# Altium PCB controller.PcbDoc
Units mm, origin at the board's own origin, x right, y up, seen from the top; angles counter-clockwise.
Board outline 135 x 75 mm, 2 copper layers (Top Layer, Bottom Layer), stack 1.671 mm thick; 64 components, 55 nets, 291 pads, 47 vias.
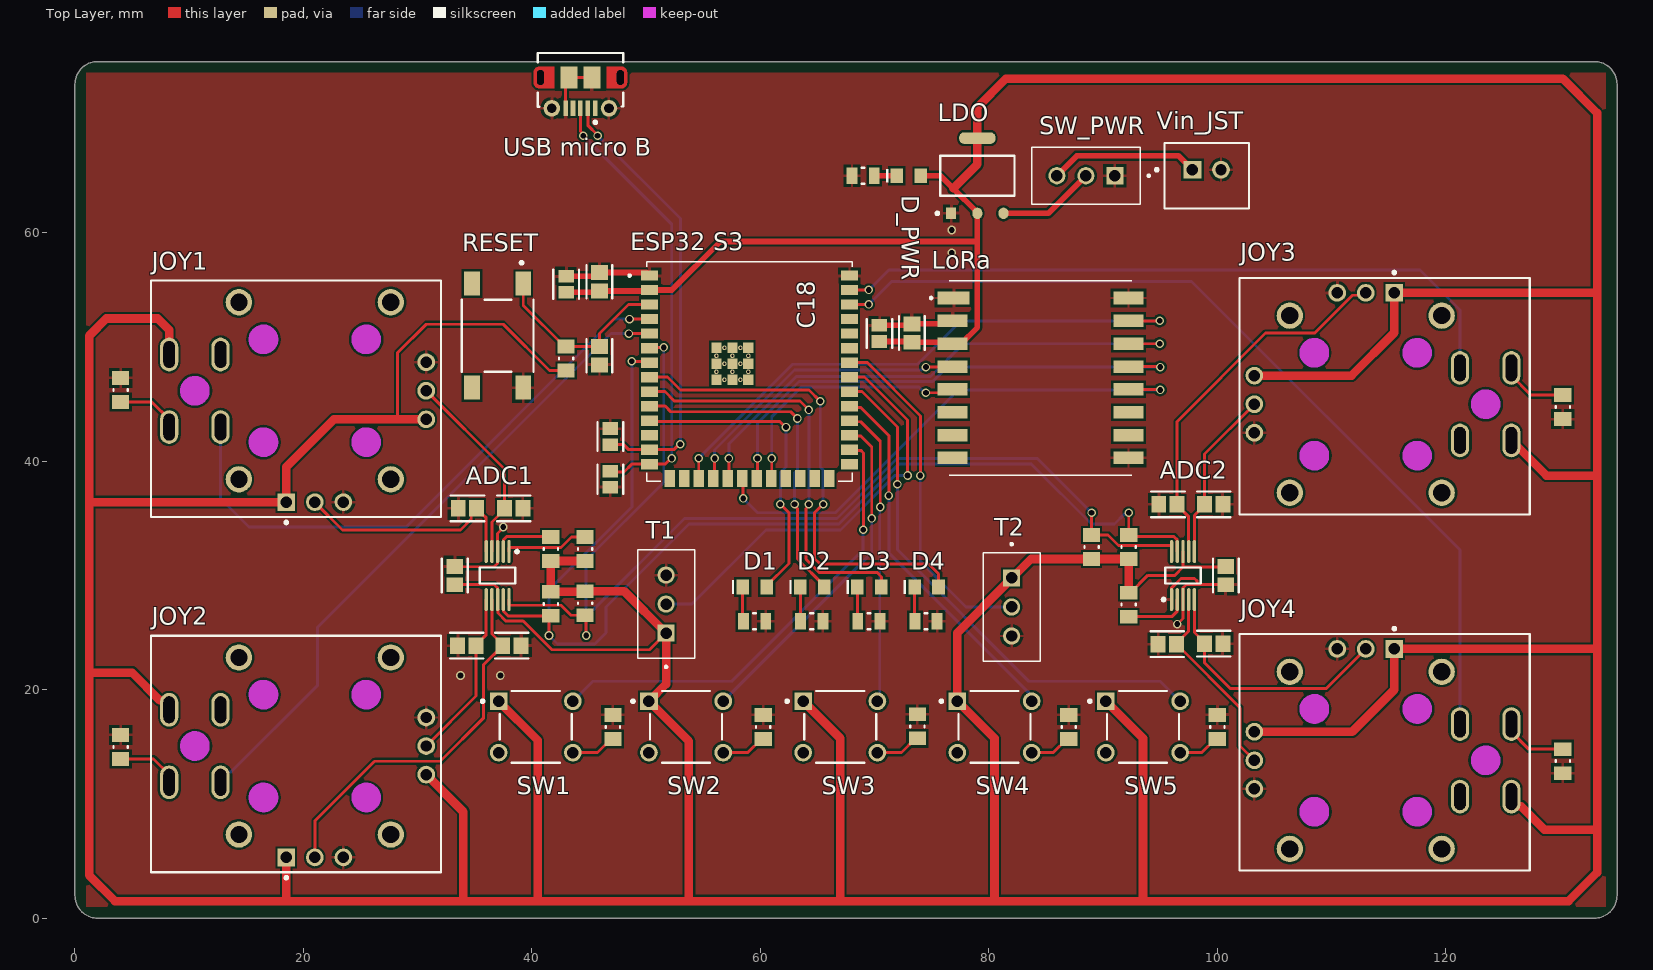
[diagram p0: Top Layer view]
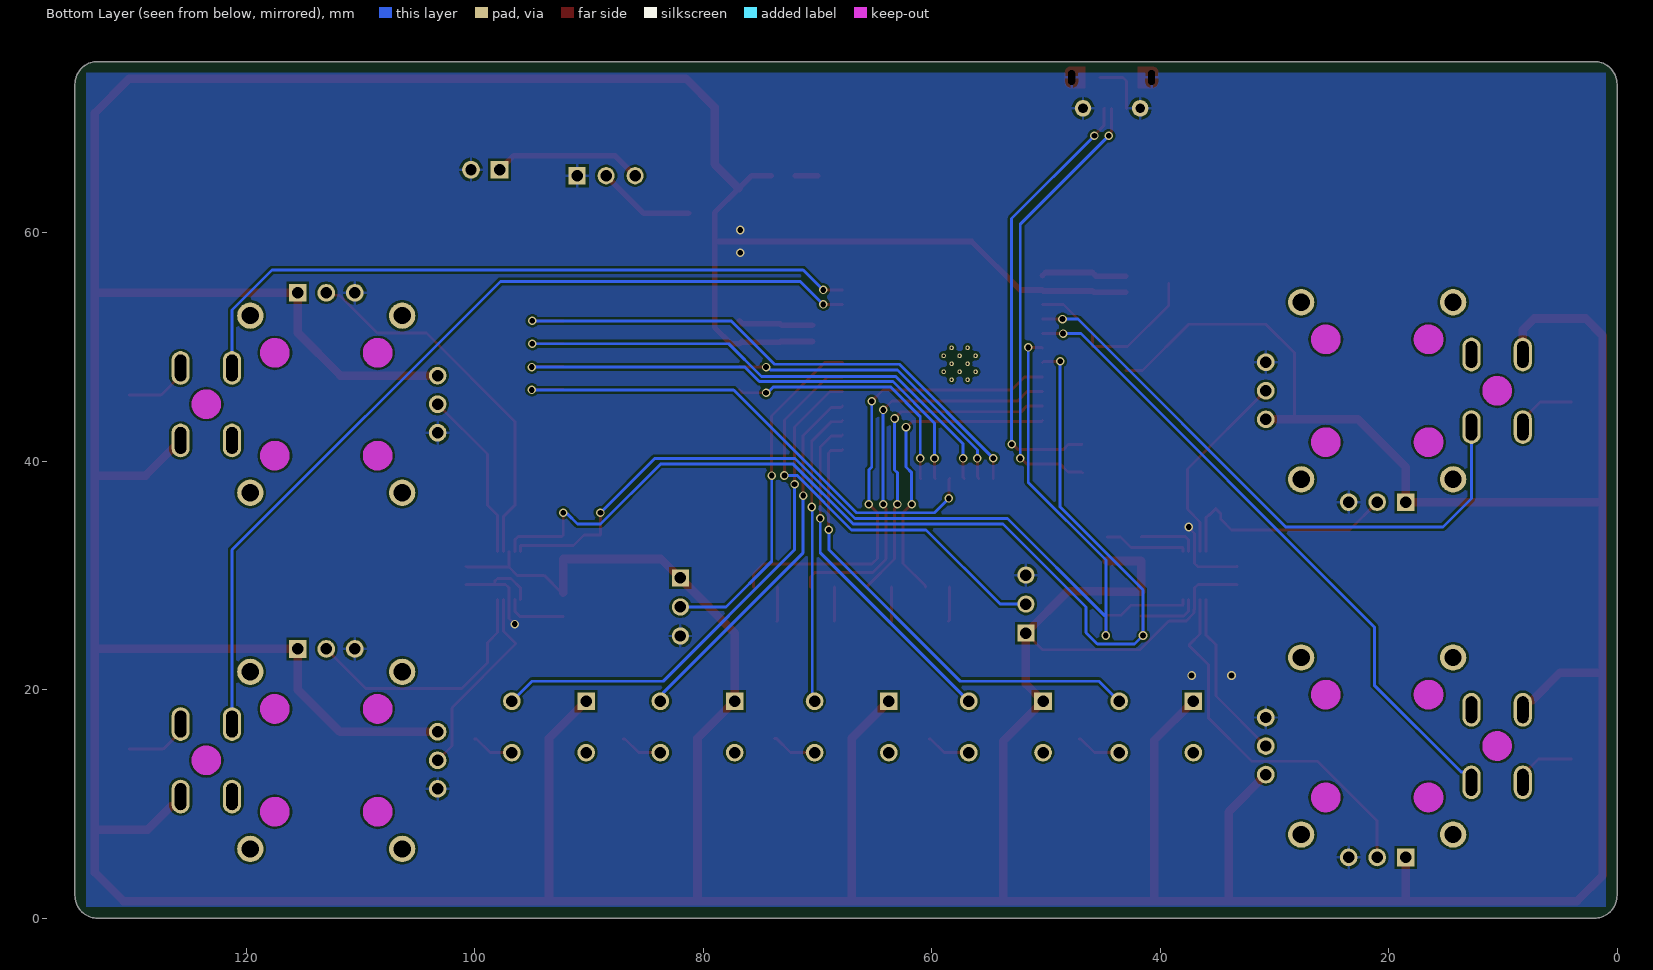
[diagram p1: Bottom Layer view, seen from below]
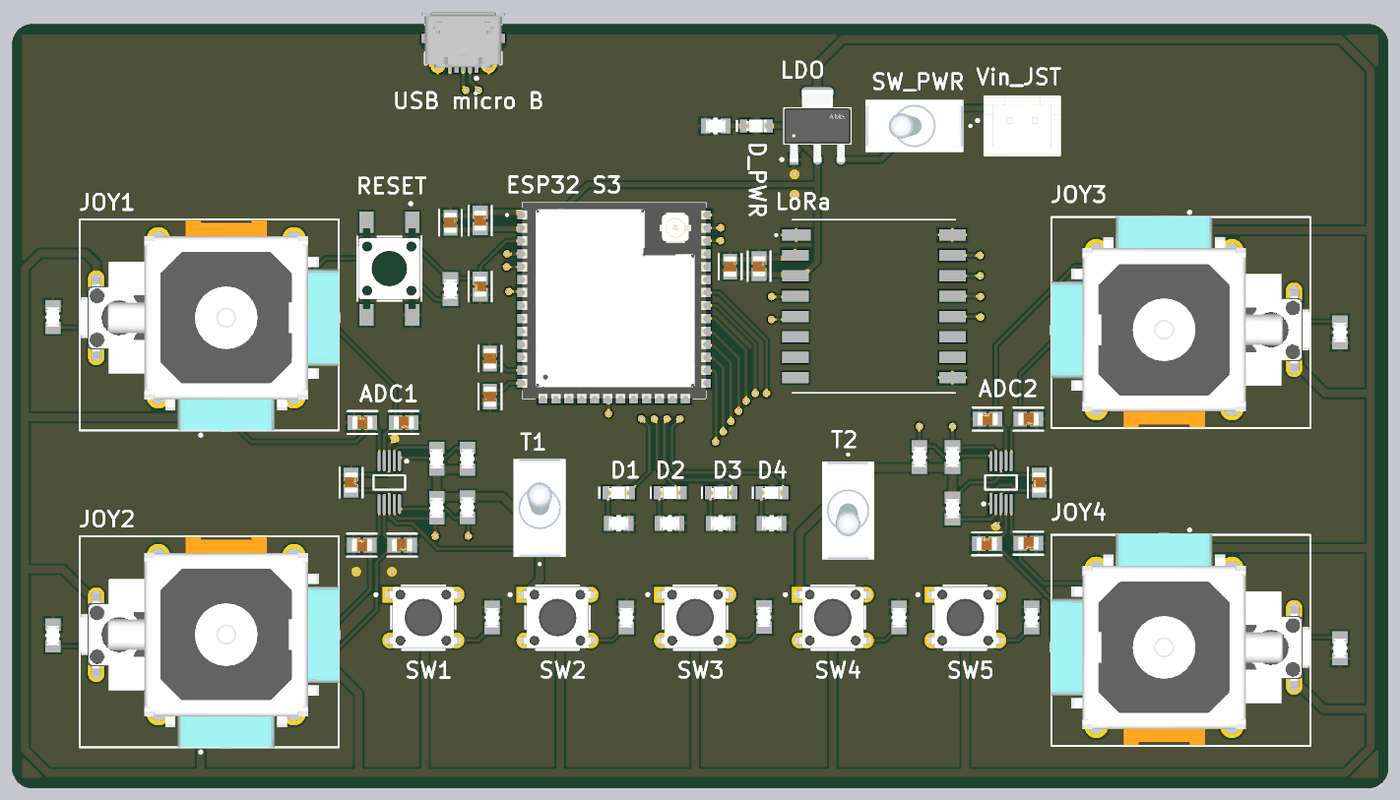
[diagram p2: 3D render of the assembled board from above, using the file's embedded part models]

## Layer stack, top to bottom
Top Solder: solder mask 0.0102, Solder Resist, Dk 3.5
Top Layer: signal copper 0.0356
Dielectric 1: dielectric 1.6, FR-4, Dk 4.6
Bottom Layer: signal copper 0.0356
Bottom Solder: solder mask 0.0102, Solder Resist, Dk 3.5

## Board outline
0,2 0,73 cw(c2,73) 2,75 133,75 cw(c133,73) 135,73 135,2 cw(c133,2) 133,0 2,0 cw(c2,2)

## Design rules (kind name [scope] priority, off if disabled: settings)
Clearance [All] p1: gap=0.2 ignorepadtopadclearanceinfootprint=TRUE
DiffPairsRouting [All] p1: maxlimit=0.254 minlimit=0.254 mostfreqgap=0.254 toplayer_minwidth=0.381 toplayer_maxwidth=0.381 toplayer_prefwidth=0.381 bottomlayer_minwidth=0.381 bottomlayer_maxwidth=0.381 bottomlayer_prefwidth=0.381 maxuncoupledlength=12.7
MinimumSolderMaskSliver [All] p1: minsoldermaskwidth=0.16
PolygonConnect [All] p1: thpad.connectstyle=Relief thpad.reliefconductorwidth=0.254 thpad.reliefentries=4 thpad.polygonreliefangle="90 Angle" thpad.airgapwidth=0.254 smdpad.connectstyle=Relief smdpad.reliefconductorwidth=0.254 smdpad.reliefentries=4 smdpad.polygonreliefangle="90 Angle" smdpad.airgapwidth=0.254 via.connectstyle=Direct via.reliefconductorwidth=0.254 via.reliefentries=4 via.polygonreliefangle="90 Angle" via.airgapwidth=0.254
RoutingVias [All] p1: holewidth=0.25 width=0.5 viastyle="Through Hole" minholewidth=0.15 minwidth=0.15 maxholewidth=0.25 maxwidth=0.5
SilkToSolderMaskClearance [IsPad] p1: minsilkscreentomaskgap=0.16 clearancetoexposedcopper=TRUE
SolderMaskExpansion [All] p1: expansion=0.102 istentingtop=FALSE
SupplyNets "Schematic Supply Nets" [InNet('GND')] p1: voltage=0.000
UnRoutedNet [All] p1: checkbadconnections=TRUE
Width [All] p1: maxlimit=1 minlimit=0.254 preferedwidth=0.254
26 further rules are at their usual default settings.

## Classes and differential pairs
differential pair D: +D_+ -D_-

## Components (designator, comment, footprint, x,y, rotation, side; value= is the part's Value field where it differs from the comment)
ADC1 "ADS1115IDGST" TI-DGS10_M 37,30 r270 top
ADC2 "ADS1115IDGST" TI-DGS10_M 97,30 r90 top
C1 "22uF" FP-0805-L_2_01_0_2-W_1_25-IPC_B 45.918,55.717 r90 top
C2 "1uF" FP-0805-L_2_01_0_2-W_1_25-IPC_B 45.918,49.243 r270 top
C3 "0.1uF" FP-0805-L_2_01_0_2-W_1_25-IPC_C 43,55.5 r90 top
C4 "1uF" FP-0805-L_2_01_0_2-W_1_25-IPC_B 33.25,30 r90 top
C5 "0.1uF" FP-0805-L_2_01_0_2-W_1_25-IPC_C 46.876,38.43 r270 top
C6 "0.1uF" FP-0805-L_2_01_0_2-W_1_25-IPC_C 46.876,42.17 r90 top
C7 "1uF" FP-0805-L_2_01_0_2-W_1_25-IPC_B 38.417,35.886 r0 top
C9 "1uF" FP-0805-L_2_01_0_2-W_1_25-IPC_B 34.363,35.886 r180 top
C10 "1uF" FP-0805-L_2_01_0_2-W_1_25-IPC_B 34.312,23.862 r180 top
C11 "1uF" FP-0805-L_2_01_0_2-W_1_25-IPC_B 38.256,23.862 r0 top
C12 "1uF" FP-0805-L_2_01_0_2-W_1_25-IPC_B 95.62,23.996 r180 top
C13 "1uF" FP-0805-L_2_01_0_2-W_1_25-IPC_B 99.688,24.044 r0 top
C14 "1uF" FP-0805-L_2_01_0_2-W_1_25-IPC_B 99.688,36.228 r0 top
C15 "1uF" FP-0805-L_2_01_0_2-W_1_25-IPC_B 95.688,36.228 r180 top
C16 "1uF" FP-0805-L_2_01_0_2-W_1_25-IPC_B 100.75,30 r270 top
C17 "22uF" FP-0805-L_2_01_0_2-W_1_25-IPC_B 73.272,51.231 r90 top
C18 "0.1uF" FP-0805-L_2_01_0_2-W_1_25-IPC_C 70.43,51.193 r90 top
D1 "150080BS75000" WL-SMCW_0805_150080xx75000 59.5,29 r0 top
D2 "150080BS75000" WL-SMCW_0805_150080xx75000 64.55,29 r0 top
D3 "150080BS75000" WL-SMCW_0805_150080xx75000 69.55,29 r0 top
D4 "150080BS75000" WL-SMCW_0805_150080xx75000 74.55,29 r0 top
D_PWR "150080BS75000" WL-SMCW_0805_150080xx75000 73,65 r0 top
"ESP32 S3" "ESP32-S3-WROOM-1U-N16R8" XCVR_ESP32-S3-WROOM-1U-N16R8 59.055,47.85 r0 top
JOY1 "RKJXK122400Y" FP-RKJXK122400Y-MFG 21,46.175 r270 top
JOY2 "RKJXK122400Y" FP-RKJXK122400Y-MFG 21,15.075 r270 top
JOY3 "RKJXK122400Y" FP-RKJXK122400Y-MFG 113,45 r90 top
JOY4 "RKJXK122400Y" FP-RKJXK122400Y-MFG 113,13.825 r90 top
LDO "AMS1117-3.3" FP-AMS1117-IPC_C 79,65 r90 top
LoRa "RA-02_LORA" MODULE_RA-02_LORA 84.53,47.296 r0 top
R1 "10k" FP-CRCW0805-e3-IPC_A 43,49 r90 top
R2 "10k" FP-CRCW0805-e3-IPC_A 44.659,27.575 r90 top
R3 "10k" FP-CRCW0805-e3-IPC_A 41.659,27.524 r90 top
R4 "10k" FP-CRCW0805-e3-IPC_A 44.659,32.325 r270 top
R5 "10k" FP-CRCW0805-e3-IPC_A 41.659,32.325 r270 top
R6 "10k" FP-CRCW0805-e3-IPC_A 130.25,13.75 r90 top
R8 "10k" FP-CRCW0805-e3-IPC_A 130.25,44.75 r90 top
R9 "10k" FP-CRCW0805-e3-IPC_A 4,15 r270 top
R10 "10k" FP-CRCW0805-e3-IPC_A 4,46.25 r270 top
R11 "10k" FP-CRCW0805-e3-IPC_A 89,32.5 r270 top
R12 "10k" FP-CRCW0805-e3-IPC_A 92.25,32.5 r270 top
R13 "10k" FP-CRCW0805-e3-IPC_A 92.25,27.449 r90 top
R15 "1k" FP-CRCW0805-e3-MFG 69,65 r180 top
R16 "1k" FP-CRCW0805-e3-MFG 59.5,26 r0 top
R17 "10k" FP-CRCW0805-e3-IPC_A 47.092,16.75 r270 top
R18 "10k" FP-CRCW0805-e3-IPC_A 60.25,16.75 r270 top
R19 "1k" FP-CRCW0805-e3-MFG 64.5,26 r0 top
R20 "10k" FP-CRCW0805-e3-IPC_A 73.75,16.801 r270 top
R21 "10k" FP-CRCW0805-e3-IPC_A 87,16.75 r270 top
R22 "1k" FP-CRCW0805-e3-MFG 69.5,26 r0 top
R23 "1k" FP-CRCW0805-e3-MFG 74.5,26 r0 top
R24 "10k" FP-CRCW0805-e3-IPC_A 100,16.75 r270 top
RESET "EN" FP-FSM2JSMAA-MFG 37,51 r0 top
SW1 "EVQ-PAC07K" FP-EVQ-PAC07K-MFG 40.342,16.75 r0 top
SW2 "EVQ-PAC07K" FP-EVQ-PAC07K-MFG 53.5,16.75 r0 top
SW3 "EVQ-PAC07K" FP-EVQ-PAC07K-MFG 67,16.75 r0 top
SW4 "EVQ-PAC07K" FP-EVQ-PAC07K-MFG 80.5,16.75 r0 top
SW5 "EVQ-PAC07K" FP-EVQ-PAC07K-MFG 93.5,16.75 r0 top
SW_PWR "ATE1D-2M3-10-Z" SW_ATE1D-2M3-10-Z 88.5,65 r0 top
T1 "ATE1D-2M3-10-Z" SW_ATE1D-2M3-10-Z 51.75,27.5 r270 top
T2 "ATE1D-2M3-10-Z" SW_ATE1D-2M3-10-Z 82,27.25 r90 top
"USB micro B" "105017-0001" USB-MICRO-B_V 44.25,72.25 r180 top
Vin_JST "B2B-XH-A(LF)(SN)" FP-B2B-XH-A_LF_SN-MFG 99.079,65 r0 top

## Footprints (in the part's own frame and the unit in brackets; to place one, negate y for a bottom-side part, rotate by r counter-clockwise, add the part's x,y. Pads: shape width x height; smd on the part's side, far side on the other; paste and mask are expansions set on the pad)
FP-0805-L_2_01_0_2-W_1_25-IPC_B [mm]
  rect 1.305x1.456 smd paste+0 mask+0: 1(-0.806,0) 2(0.806,0)
  silkscreen extent -1.46,-1.13 1.46,1.13, body extent -1.71,-0.98 1.71,0.98, height 0.25
FP-0805-L_2_01_0_2-W_1_25-IPC_C [mm]
  rect 1.105x1.356 smd paste+0 mask+0: 1(-0.706,0) 2(0.706,0)
  silkscreen extent -1.26,-1.12 1.26,1.12, body extent -1.36,-0.82 1.36,0.82, height 0.25
FP-AMS1117-IPC_C [mm]
  rect 1.004x0.872 smd paste+0 mask+0: 1(-3.295,2.29)
  rrect100% 1.004x0.872 smd paste+0 mask+0: 2(-3.295,0) 3(-3.295,-2.29)
  rrect87% 1.004x3.182 smd paste+0 mask+0: 4(3.295,0)
  silkscreen extent -3.42,-3.25 1.75,3.62, body extent -3.9,-3.35 3.9,3.35, height 0.25
FP-B2B-XH-A_LF_SN-MFG [mm]
  rect 1.55x1.55 hole 1 paste-2539.97 mask+0: 1(-1.25,0.525)
  round 1.55 hole 1 paste-2539.97 mask+0: 2(1.25,0.525)
  silkscreen extent -4.5,-2.88 3.7,2.88, body extent -3.8,-2.98 3.8,2.98, height 0.25
FP-CRCW0805-e3-IPC_A [mil]
  rect 47.5x59.38 smd paste+0 mask+0: 1(-41.37,0) 2(41.37,0)
  silkscreen extent -3,-25 3,25, body extent -85,-49 85,49, height 10
FP-CRCW0805-e3-MFG [mm]
  rect 0.95x1.45 smd paste+0 mask+0: 1(-0.975,0) 2(0.975,0)
  silkscreen extent -0.13,-0.7 0.13,0.7, body extent -1.55,-0.82 1.55,0.82, height 0.25
FP-EVQ-PAC07K-MFG [mm]
  rect 1.55x1.55 hole 1 paste-2539.97 mask+0: A(-3.25,2.25)
  round 1.55 hole 1 paste-2539.97 mask+0: A'(-3.25,-2.25) B(3.25,2.25) B'(3.25,-2.25)
  silkscreen extent -4.77,-3.15 3.15,3.15, body extent -4.13,-3.25 4.13,3.25, height 0.25
FP-FSM2JSMAA-MFG [mm]
  rect 1.38x2.1 smd paste+0 mask+0: 1(2.25,4.55) 2(2.24,-4.55) 3(-2.24,4.55) 4(-2.24,-4.55)
  silkscreen extent -3.15,-3.15 3.15,6.5, body extent -3,-5 3,5, height 4.59
FP-RKJXK122400Y-MFG [mm]
  round 2.3 hole 1.5 paste-2539.97 mask+0: 1(-7.75,6.65) 2(7.75,6.65) 3(-7.75,-6.65) 4(7.75,-6.65)
  rect 1.55x1.55 hole 1 paste-2539.97 mask+0: 1_VR1(9.75,-2.5)
  round 1.55 hole 1 paste-2539.97 mask+0: 1_VR2(2.5,9.75) 2_VR1(9.75,0) 2_VR2(0,9.75) 3_VR1(9.75,2.5) 3_VR2(-2.5,9.75)
  rrect100% 2.95x1.6 hole 1 slot 2.35 at 0 deg paste-2539.97 mask+0: a(-3.175,-8.25) b(-3.175,-12.75) c(3.175,-8.25) d(3.175,-12.75)
  Keep-Out Layer circle w1.3: c0,-10.5 r0.65
  Keep-Out Layer circle w1.3: c4.5,-4.5 r0.65
  Keep-Out Layer circle w1.3: c-4.5,-4.5 r0.65
  Keep-Out Layer circle w1.3: c4.5,4.5 r0.65
  Keep-Out Layer circle w1.3: c-4.5,4.5 r0.65
  silkscreen extent -9.65,-14.35 11.65,11.05, body extent -9.75,-14.45 11.15,11.15, height 0.25
MODULE_RA-02_LORA [mm]
  rect 2.8x1.1 smd: 1(-7.6,7)
  rect 2.6x1.1 smd: 2(-7.7,5) 3(-7.7,3) 4(-7.7,1) 5(-7.7,-1) 6(-7.7,-3) 7(-7.7,-5) 8(-7.7,-7) 9(7.7,-7) 10(7.7,-5) 11(7.7,-3) 12(7.7,-1) 13(7.7,1) 14(7.7,3) 15(7.7,5) 16(7.7,7)
  silkscreen extent -9.68,-8.5 8,8.5
SW_ATE1D-2M3-10-Z [mm]
  rect 1.508x1.508 hole 1: 1(2.54,0)
  round 1.508 hole 1: 2(0,0) 3(-2.54,0)
  silkscreen extent -4.75,-2.5 5.6,2.5, body extent -4.75,-2.5 4.75,2.5, height 18
TI-DGS10_M [mm] "SOP, 10-Leads, Body 3x3mm, Pitch 0.5mm, IPC Low Density"
  oval 2x0.3 smd: 1(-2.1,1) 2(-2.1,0.5) 3(-2.1,0) 4(-2.1,-0.5) 5(-2.1,-1) 6(2.1,-1) 7(2.1,-0.5) 8(2.1,0) 9(2.1,0.5) 10(2.1,1)
  silkscreen extent -2.22,-1.55 0.7,1.83, body extent -1.55,-1.55 1.55,1.55, height 1.1
USB-MICRO-B_V [mm] "USB, MICRO B, Body 7.491x4.695 mm, Pitch 0.65 mm"
  rect 0.4x1.35 smd: 1(-1.3,1.35) 2(-0.65,1.35) 3(0,1.35) 4(0.65,1.35) 5(1.3,1.35)
  round 1.45 hole 0.85: 6(-2.5,1.35) 7(2.5,1.35)
  rrect50% 0x0 hole 0.6 slot 1.3 at 90 deg: 8(-3.5,-1.35) 11(3.5,-1.35)
  rect 1.5x1.9 smd: 9(-1,-1.35) 10(1,-1.35)
  Top Layer circle w0.5: c3.6,-0.9 r0.25
  Top Layer circle w0.5: c3.6,-1.8 r0.25
  Top Layer circle w0.5: c-3.6,-0.9 r0.25
  Top Layer circle w0.5: c-3.6,-1.8 r0.25
  Top Layer region: -2.3,-2.3 -2.3,-0.4 -3.6,-0.4 -3.6,-2.3
  Top Layer region: 2.3,-0.4 2.3,-2.3 3.6,-2.3 3.6,-0.4
  Top Layer region: 3.6,-0.9 3.6,-1.8 4.1,-1.8 4.1,-0.9
  Top Layer region: -3.6,-1.8 -3.6,-0.9 -4.1,-0.9 -4.1,-1.8
  silkscreen extent -3.75,-3.5 3.75,2.7, body extent -4.1,-3.9 4.1,1.5, height 2.67
WL-SMCW_0805_150080xx75000 [mm] "SMD Mono-color Chip LED, body 2.0x1.25mm"
  rect 1.1x1.3 smd: 1(-1.05,0) 2(1.05,0)
  silkscreen extent -2,-0.6 -1.8,0.6, body extent -1,-0.63 1,0.62, height 0.7
XCVR_ESP32-S3-WROOM-1U-N16R8 [mm]
  rect 1.5x0.9 smd: 1(-8.75,8.41) 2(-8.75,7.14) 3(-8.75,5.87) 4(-8.75,4.6) 5(-8.75,3.33) 6(-8.75,2.06) 7(-8.75,0.79) 8(-8.75,-0.48) 9(-8.75,-1.75) 10(-8.75,-3.02) 11(-8.75,-4.29) 12(-8.75,-5.56) 13(-8.75,-6.83) 14(-8.75,-8.1) 27(8.75,-8.1) 28(8.75,-6.83) 29(8.75,-5.56) 30(8.75,-4.29) 31(8.75,-3.02) 32(8.75,-1.75) 33(8.75,-0.48) 34(8.75,0.79) 35(8.75,2.06) 36(8.75,3.33) 37(8.75,4.6) 38(8.75,5.87) 39(8.75,7.14) 40(8.75,8.41)
  rect 0.9x1.5 smd: 15(-6.985,-9.35) 16(-5.715,-9.35) 17(-4.445,-9.35) 18(-3.175,-9.35) 19(-1.905,-9.35) 20(-0.635,-9.35) 21(0.635,-9.35) 22(1.905,-9.35) 23(3.175,-9.35) 24(4.445,-9.35) 25(5.715,-9.35) 26(6.985,-9.35)
  rect 0.9x0.9 smd: 41_1(-2.9,2.09) 41_2(-1.5,2.09) 41_3(-0.1,2.09) 41_4(-2.9,0.69) 41_5(-1.5,0.69) 41_6(-0.1,0.69) 41_7(-2.9,-0.71) 41_8(-1.5,-0.71) 41_9(-0.1,-0.71)
  round 0.4 hole 0.2 mask+0: 41_10(-2.2,2.09) 41_11(-0.8,2.09) 41_12(-2.9,1.39) 41_13(-1.5,1.39) 41_14(-0.1,1.39) 41_15(-2.2,0.69) 41_16(-0.8,0.69) 41_17(-2.9,-0.01) 41_18(-1.5,-0.01) 41_19(-0.1,-0.01) 41_20(-2.2,-0.71) 41_21(-0.8,-0.71)
  silkscreen extent -10.6,-9.6 9,9.6, body extent -9,-9.6 9,9.6, height 3.35

## Part data
ADC1 ADC2: library part CMP-0003-00378-2, "16-Bit ADC with Integrated Multiplexer, PGA, Comparator, Oscillator, and Reference, -40 to 125 degC, 10-pin SOP (DGS10), Green (RoHS & no Sb/Br)", Analog Voltage AV/DD(Max)(V)=5.5, Analog Voltage AV/DD(Min)(V)=2, Manufacturer="Texas Instruments", # Input Channels=4, Architecture=Delta-Sigma, Code_JEDEC=MO-153, ComponentLink1Description="Manufacturer URL", ComponentLink1URL=http://www.ti.com/, ComponentLink2Description=Datasheet, ComponentLink2URL=http://www.ti.com/general/docs/lit/getliterature.tsp?genericPartNumber=ADS1115&fileType=pdf, ComponentLink3Description="Package Specification", ComponentLink3URL=http://www.ti.com/lit/ml/mpds035b/mpds035b.pdf, DatasheetVersion=SBAS444B, Digital Supply(Max)(V)=5.5, Digital Supply(Min)(V)=2, Eco-Plan="Green (RoHS & no Sb/Br)", INL(Max)(+/-LSB)=1, Interface="Serial I2C", Mounting Technology="Surface Mount", PackageDescription="10-Pin Plastic Small Outline, Body 3 x 3 mm, Pitch 0.5 mm", PackageReference=DGS10, PackageVersion="4073272/C, 02/2004", PartNumber=ADS1115IDGST, Resolution(Bits)=16, Sample Rate (max)(SPS)=860, SubFamily="Precision ADC (<=10MSPS)"
C1 C17: library part CMP-1036-04939-3, "General Purpose Ceramic Capacitor, 0805, 22uF, 20%, X5R, 15%, 6.3V", Case Code (Imperial)=0805, Case Code (Metric)=2012, Dielectric=X5R, Dielectric Material=Ceramic, Insulation Resistance=10GR, Max Operating Temperature=85°C, Min Operating Temperature=-55°C, Package Quantity=1, Tolerance=20%, Voltage=6.3V, Capacitance=22uF, Case/Package=0805, Depth=1.25mm, Dissipation Factor=12.5%, Height=1.4mm, Lead Free="Lead Free", Length=2.01mm, Mount="Surface Mount", Number of Pins=2, Packaging="Tape and Reel", Radiation Hardening=No, REACH SVHC="No SVHC", RoHS Compliant=Yes, Termination=SMD/SMT, Thickness=0.055inch, Voltage Rating=6.3V, Voltage Rating (DC)=6.3V, Width=0.049inch
C2 C4 C7 C9 C10 C11 C12 C13 C14 C15 C16: library part CMP-2007-04599-2, "General Purpose Ceramic Capacitor, 0805, 1uF, 10%, X7R, 15%, 25V", Case Code (Imperial)=0805, Case Code (Metric)=2012, Dielectric=X7R, Max Operating Temperature=125°C, Min Operating Temperature=-55°C, Package Quantity=1, Temperature Coefficient=30ppm/°C, Tolerance=10%, Voltage=25V, Capacitance=1uF, Case/Package=0805, Construction=Flat, Contact Plating=Tin, Depth=1.25mm, Features="Soft Termination", Height=1.4mm, Lead Free="Lead Free", Length=2.01mm, Mount="Surface Mount", Number of Pins=2, Packaging="Tape and Reel", Radiation Hardening=No, REACH SVHC="No SVHC", RoHS Compliant=Yes, Series=FLEXITERM®, Termination=SMD/SMT, Thickness=0.055inch, Voltage Rating=25V, Voltage Rating (DC)=25V, Width=1.25mm
C3 C5 C6 C18: library part CMP-2000-05016-2, "General Purpose Ceramic Capacitor, 0805, 100nF, 10%, X7R, 0.15, 50V", Capacitance=100nF, Case Code (Imperial)=0805, Case Code (Metric)=2012, Dielectric=X7R, Dielectric Material=Ceramic, Insulation Resistance=100GR, Max Operating Temperature=125°C, Min Operating Temperature=-55°C, Package Quantity=4000, Tolerance=10%, Voltage=50V, Case/Package=0805, Depth=1.25mm, Dissipation Factor=2.5%, Height=0.5mm, Lead Free="Lead Free", Length=2mm, Mount="Surface Mount", Number of Pins=2, Packaging="Cut Tape", Radiation Hardening=No, REACH SVHC="No SVHC", RoHS Compliant=Yes, Series="MLCC X7R", Termination=Standard, Thickness=0.037inch, Voltage Rating=50V, Voltage Rating (DC)=50V, Weight=0.001411oz, Width=1.2mm
D1 D2 D3 D4 D_PWR: library part CMP-1426-00008-7, "Led, Blue, 470 Nm, 3.2 V, 30 Ma, 145 Mcd Rohs Compliant: Yes", Case Code (Imperial)=0805, Case Code (Metric)=2012, Color=Blue, Forward Current=100mA, Forward Voltage=3.2V, Max Junction Temperature (Tj)=95°C, Max Operating Temperature=85°C, Max Reverse Voltage (DC)=5V, Min Operating Temperature=-40°C, Power Dissipation=105mW, Test Current=20mA, Case/Package=0805, Dominant Wavelength=470nm, Height=700µm, Lead Free="Lead Free", Length=2mm, Lens Style="Clear, Rectangular", Luminous Intensity=145mcd, Mount="Surface Mount", Packaging="Tape and Reel", Peak Wavelength=465nm, REACH SVHC=Unknown, Reverse Voltage=5V, RoHS=Compliant, Viewing Angle=140°, Wavelength=470nm, Width=1.25mm
"ESP32 S3": "Bluetooth, WiFi 802.11b/g/n, Bluetooth v5.0 Transceiver Module 2.4GHz Antenna Not Included, U.FL Surface Mount", Package=None, Availability=Unavailable, Check_prices=https://www.snapeda.com/parts/ESP32-S3-WROOM-1U-N16R8/Espressif+Systems/view-part/?ref=eda, MF="Espressif Systems", MP=ESP32-S3-WROOM-1U-N16R8, Price=None, SnapEDA_Link=https://www.snapeda.com/parts/ESP32-S3-WROOM-1U-N16R8/Espressif+Systems/view-part/?ref=snap
JOY1 JOY2 JOY3 JOY4: library part CMP-24118-000005-1, "Res POT 10K Ohm 0.0125W (25.4 X 20.7 X 19.3mm) Pin Bracket Mount/Through Hole Tray", Contact Current Rating=50mA, Insulation Resistance=100MR, Max Operating Temperature=70°C, Min Operating Temperature=-10°C, Package Quantity=1000, Power Rating=12.5mW, Resistance=10kR, Resistor Type=Potentiometer, Current Rating=50mA, Depth=20.7mm, Height=12.9mm, Length=16mm, Life (Hours)=100Hour, Military Standard=Not, Mount="Through Hole", Packaging=Tray, Radiation Hardening=No, RoHS Compliant=Yes, Series="RKJXV/ RKJXK", Termination=Pin, Type=Potentiometer, Width=16mm
LDO: library part CMP-209535-000001-1, "LDO Voltage Regulators 1A, 3.3V", Dropout Voltage=1.1V, Manufacturer="Advanced Monolithic Systems", Max Junction Temp=+125°C, Max Power Dissipation=1.2W, Max Supply Voltage=15V, Nominal Supply Current=5mA, Output Current=1A, Output Voltage=3.3V, Package=AMS1117, Temperature="-40°C to +125°C", Temperature Range Low=-40°C, Automotive=No, Category=IC, ComponentLink2Description=Datasheet, ComponentLink2URL=http://www.advanced-monolithic.com/pdf/ds1117.pdf, Device Class L1="Integrated Circuits (ICs)", Device Class L2="Power Management ICs", Device Class L3="Voltage Regulators - Linear", Height=1.8mm, Ipc Land Pattern Name=SOT229P700X180-4, Lead Free=Yes, Manufacturer Part Number=AMS1117-3.3, Number Of Outputs=1, Octopart=https://octopart.com/ams1117-3.3-advanced+monolithic+systems-25899300, Output Type=Fixed, RoHS=TRUE, Standoff Height=0.64mm, Temperature Range High=+125°C
LoRa: "Ra-02 LoRa RF M5Stack Platform Evaluation Expansion Board", Package=None, Availability=Unavailable, MP=RA-02_LORA, Price=None
R1 R2 R3 R4 R5 R6 R8 R9 R10 R11 R12 R13 R17 R18 R20 R21 R24: library part CMP-2001-04908-2, "RES Thick Film, 10kΩ, 1%, 0.125W, 100ppm/°C, 0805", Case Code (Imperial)=0805, Case Code (Metric)=2012, Max Operating Temperature=155°C, Min Operating Temperature=-55°C, Package Quantity=5000, Power Rating=125mW, Resistance=10kR, Temperature Coefficient=100ppm/°C, Tolerance=1%, Voltage Rating=150V, Case/Package=0805, Composition="Thick Film", Contact Plating=Tin, Depth=1.25mm, Height=0.45mm, Lead Free="Lead Free", Length=2mm, Military Standard=Not, Packaging="Tape and Reel", Radiation Hardening=No, Termination=SMD/SMT, Voltage Rating (DC)=150V, Weight=0.000194oz, Width=1.25mm
R15 R16 R19 R22 R23: library part CMP-2001-03607-2, "RES Thick Film, 1.2kΩ, 1%, 0.125W, 100ppm/°C, 0805", Case Code (Imperial)=0805, Case Code (Metric)=2012, Max Operating Temperature=155°C, Max Power Dissipation=125mW, Min Operating Temperature=-55°C, Package Quantity=10, Resistance=1.2kR, Temperature Coefficient=100ppm/°C, Tolerance=1%, Voltage Rating=150V, Case/Package=0805, Composition="Thick Film", Contact Plating=Tin, Depth=1.25mm, Features="Automotive AEC-Q200", Height=0.45mm, Lead Free="Lead Free", Length=2mm, Military Standard=Not, Number of Terminations=2, Packaging="Tape and Reel", Power Rating=125mW, Radiation Hardening=No, Termination=SMD/SMT, Voltage Rating (DC)=150V, Weight=0.000194oz, Width=0.049inch
RESET: library part CMP-03402-000003-1, "SWITCH TACTILE SPST-NO 0.05A 24V", Contact Current Rating=50mA, Contact Resistance=100mΩ, Manufacturer="TE Connectivity", Manufacturer Part Number=FSM2JSMAA, Operating Force=260gf, Package=0, Temperature="-35°C to +85°C", Temperature Range High=+85°C, Temperature Range Low=-35°C, Voltage Rating Dc=24V, Automotive=No, Category=Switch, ComponentLink2Description=Datasheet, ComponentLink2URL=https://www.te.com/commerce/DocumentDelivery/DDEController?Action=showdoc&DocId=Customer+Drawing%7F2-1437565-7%7FV%7Fpdf%7FEnglish%7FENG_CD_2-1437565-7_V.pdf%7F2-1437565-8, Device Class L1=Electromechanical, Device Class L2=Switches, Device Class L3="Pushbutton Switches", Digikey Description="SWITCH TACTILE SPST-NO 0.05A 24V", Electromechanical Life=100000Cycles, Height=4.59mm, Lead Free=Yes, Mount="Surface Mount", Mouser Description="Tactile Switches TACTILE 260G FORCE S", Octopart=https://octopart.com/fsm2jsmaa-te+connectivity-41720620, RoHS=TRUE, Standoff Height=0.05mm, Throw Configuration=SPST-NO
SW1 SW2 SW3 SW4 SW5: library part CMP-00287-39841884-1, "EVQ-PAC07K Switch Tactile N.O. SPST Round Button PC Pins 0.02A 15VDC 1N Thru-Hole Bulk", Color=Black, Contact Current Rating=20mA, Contact Resistance=50mΩ, Max Operating Temperature=70°C, Max Voltage Rating (DC)=15V, Min Operating Temperature=-20°C, Operating Force=1N, Actuator Length=3.1mm, Contact Plating="Gold, Silver", Current Rating=20mA, Depth=7.8mm, Electrical Life=100kcycles, Height=7mm, Illumination Type="Illuminated, Non-Illuminated", Lead Free="Lead Free", Length=6mm, Life (Cycles)=100kcycles, Max Current Rating=20mA, Mechanical Life=100kcycles, Mount="Through Hole", NexarPartId=39841884, Number of Positions=2, Orientation=Straight, Packaging=Bulk, Radiation Hardening=No, REACH SVHC=Unknown, RoHS=Compliant, Switch Function=Off-Mom, Switch Travel=250µm, Termination="PC Pins", Throw Configuration=SPST, Voltage Rating (DC)=15V, Width=6mm
SW_PWR T1 T2: "Toggle Switch SPDT Through Hole", Package=None, Check_prices=https://www.snapeda.com/parts/ATE1D-2M3-10-Z/Nidec+Copal+Electronics/view-part/?ref=eda, Digi-Key_Part_Number=563-1157-ND, MF="Nidec Copal Electronics", MP=ATE1D-2M3-10-Z, Purchase-URL=https://pricing.snapeda.com/search/part/ATE1D-2M3-10-Z/?ref=eda, SnapEDA_Link=https://www.snapeda.com/parts/ATE1D-2M3-10-Z/Nidec+Copal+Electronics/view-part/?ref=snap
"USB micro B": library part CMP-2000-05827-1, "Micro-USB B Receptacle, Right Angle, Bottom Mount, Surface Mount, with Solder Tabs, -30 to 85 degC, 5-Pin USB, RoHS, Tape and Reel", Manufacturer=Molex, Package Description="5-Leads USB, Micro B, Body 7.5 x 5 mm, Pitch 0.65 mm", Package Reference=MICRO-B, Package Version="Rev. F, 12/2012", Standard Package=1, Voltage - Max=30V, 3D Model=105017-0001.stp, Catalog Drawings=1050170001, Category=Connectors,Interconnects, Circuits=5, Connector Type=USB-microB, Datasheet URL=http://www.molex.com/elqNow/elqRedir.htm?ref=http://www.molex.com/webdocs/datasheets/pdf/en-us/1050170001_IO_CONNECTORS.pdf, Datasheet Version=03/2016, Family=USB,DVI,HDMIConnectors, Featured Product=Micro-USBConnectorsUSBConnectors, Features=Shielded,SolderRetention, Gender=Receptacle, Ingress Protection=-, Manufacturer URL=http://www.molex.com/, Mating Products=WM17145-ND-CABLEMICROUSBBTOSTDA1.0MWM17147-ND-CABLEMICROUSBBTOSTDA2.0MWM17146-ND-CABLEMICROUSBBTOSTDA1.5M, Mounting Technology=SurfaceMount, Mounting Type=BoardCutout,SurfaceMount,RightAngle, Number of Contacts=5, Online Catalog=Molex-MicroUSB, Other Names=WM1399DKR, Package URL=http://www.molex.com/pdm_docs/sd/1050170001_sd.pdf, Packaging=Digi-Reel®, PCN Assembly/Origin=ResinSupplier21/Oct/2015, RoHS Information=1050170001CertofCompliance, Series=-, Specifications=-
Vin_JST: library part CMP-2000-05888-3, "CONN HEADER VERT 2POS 2.5MM", Color=Natural, Contact Resistance=20mR, Current Rating=3A, Housing Color=White, Insulation Resistance=1GR, Max Operating Temperature=85°C, Max Voltage Rating (AC)=250V, Min Operating Temperature=-25°C, Connector Type="Male Pin", Contact Material=Brass, Contact Plating=Tin, Contact Type="Male Pin", Depth=5.75mm, Fastening Type=Detent, Housing Material=Polyamide, Lead Free="Lead Free", Lead Pitch=2.5mm, Length=7.4mm, Max Current Rating=3A, Max Voltage Rating (DC)=250V, Mount="Through Hole", Number of Contacts=2, Number of Positions=2, Number of Rows=1, Orientation=Straight, Packaging=Bulk, Pitch=2.5mm, REACH SVHC="No SVHC", Series=XH, Termination=Solder, Voltage Rating=250V, Voltage Rating (AC)=250V, Wire/Cable Gauge=22AWG

## Via types
v1: diameter 0.75, hole 0.5, Top Layer to Bottom Layer, 47 vias

## Nets (pads, with @x,y where several pads share a name; then routed paths per layer and width w, separated by ;. In a path a pad name is that pad's centre, name@x,y a point inside that pad or via, vN(x,y) a via of type N, cw(c..) or ccw(c..) an arc to the next point about the centre after c; other vN are vias at no path point)
3v3: "ESP32 S3.2" ADC1.8 ADC2.8 C1.1 C3.1 C4.1 C16.1 C17.1 C18.1 D_PWR.2 JOY1.1_VR1 JOY1.1_VR2 JOY1.b JOY2.1_VR1 JOY2.1_VR2 JOY2.b JOY3.1_VR1 JOY3.1_VR2 JOY3.b JOY4.1_VR1 JOY4.1_VR2 JOY4.b LDO.2 LDO.4 LoRa.3 R1.1 R2.2 R3.2 R4.2 R5.2 R11.2 R12.2 R13.2 SW1.A SW2.A SW3.A SW4.A SW5.A T1.1 T2.1 | length 735
  Top Layer w0.254: 28.25,43.675 28.25,49.5 30.75,52 37.5,52 41.551,47.949 R1.1 ; C4.1 33.283,29.227 36.698,29.227 36.991,28.933 36.991,27.909 ADC1.8 37,27.038 37.023,27.015 37.023,26.994 37.023,26.71 37.714,26.019 39.238,26.019 41.757,23.5 50.29,23.5 T1.1 ; R13.2 92.401,28.5 93.922,30.021 96.289,30.021 97.009,30.741 ; ADC2.8 97.009,32.091 97.009,30.741 ; C16.1 100.685,30.741 97.009,30.741
  Top Layer w0.5: C3.1 45.801,54.794 C1.1 50.226,54.911 50.305,54.99 52.24,54.99 56.5,59.25 79,59.25 ; C18.1 73.211,50.487 C17.1 LoRa.3@76.636,50.425 ; D_PWR.2 75.771,65 76.886,63.886 79,61.771 LDO.2 79,59.25 ; LoRa.3@76.636,50.49 LoRa.3 77.58,50.296 79,51.715 79,59.25
  Top Layer w0.75: 1.25,36.257 1.418,36.425 JOY1.1_VR1 18.5,39.5 22.675,43.675 28.25,43.675 JOY1.1_VR2 ; JOY2.b 8.25,18.695 7.857,19.088 7.412,19.088 5,21.5 1.25,21.5 ; JOY1.b 8.25,51.5 7.25,52.5 2.75,52.5 1.25,51 1.25,36.272 1.25,21.5 ; JOY2.1_VR1 18.5,1.75 18.75,1.5 ; JOY2.1_VR2 34,9.325 34,1.5 ; SW1.A 40.5,15.592 40.5,1.5 ; R4.2 R5.2 R3.2 41.684,28.6 44.633,28.6 R2.2 48.084,28.626 T1.1 51.75,20.5 SW2.A 53.75,15.5 53.75,1.5 ; SW3.A 67,15.75 67,1.5 ; 76.886,63.886 79,66 LDO.4 79,71 81.5,73.5 130.25,73.5 133.25,70.5 133.25,54.75 ; SW5.A 93.5,15.75 93.5,1.5 ; R13.2 R12.2 R11.2 83.699,31.449 82.419,30.169 82.379,30.169 82.02,29.81 82.02,29.77 81.98,29.77 81.621,29.411 81.621,29.371 77.25,25 SW4.A 80.5,15.75 80.5,1.5 ; JOY4.1_VR2 111.825,16.325 115.5,20 JOY4.1_VR1 133.075,23.575 133.25,23.75 ; JOY3.1_VR2 111.75,47.5 115.5,51.25 JOY3.1_VR1 133.25,54.75 ; JOY4.b 125.75,10.205 126.143,9.812 126.588,9.812 128.65,7.75 133.25,7.75 ; JOY3.b 128.825,38.75 133.25,38.75 ; 1.25,21.5 1.25,3.75 3.5,1.5 18.75,1.5 ; 18.75,1.5 34,1.5 ; 34,1.5 40.5,1.5 ; 40.5,1.5 53.75,1.5 ; 53.75,1.5 67,1.5 ; 67,1.5 80.5,1.5 ; 80.5,1.5 93.5,1.5 ; 93.5,1.5 130.75,1.5 133.25,4 133.25,7.75 ; 133.25,7.75 133.25,23.75 ; 133.25,23.75 133.25,38.75 ; 133.25,38.75 133.25,54.75
D_+: "ESP32 S3.14" "USB micro B.3" C5.1 | length 39.9
  Top Layer w0.254: 44.25,70.9 44.25,69.384 44.249,69.383 44.249,68.885 44.5,68.634 v1(44.5,68.5) ; C5.1@46.808,39 46.876,39.068 48.068,39.068 48.75,39.75 50.305,39.75 51.65,39.75 52.15,40.25 v1(52.25,40.25)
  Bottom Layer w0.254: v1(44.5,68.5) 52.25,60.75 v1(52.25,40.25)
D_-: "ESP32 S3.13" "USB micro B.2" C6.1 | length 39.9
  Top Layer w0.254: 44.89,70.285 44.89,70.89 44.9,70.9 44.9,69.423 45.75,68.573 v1(45.75,68.5) ; C6.1@46.84,41.5 C6.1 48.036,41.464 48.48,41.02 50.305,41.02 52.42,41.02 52.9,41.5 v1(53,41.5)
  Bottom Layer w0.25: v1(45.75,68.5) 53,61.25 v1(53,41.5)
GND: "ESP32 S3.1" "ESP32 S3.40" "USB micro B.5" "USB micro B.6" "USB micro B.7" "USB micro B.8" "USB micro B.9" "USB micro B.10" "USB micro B.11" ADC1.3 ADC2.1 ADC2.3 C1.2 C2.2 C3.2 C4.2 C5.2 C6.2 C7.2 C9.2 C10.2 C11.2 C12.2 C13.2 C14.2 C15.2 C16.2 C17.2 C18.2 JOY1.3_VR1 JOY1.3_VR2 JOY2.3_VR1 JOY2.3_VR2 JOY3.3_VR1 JOY3.3_VR2 JOY4.3_VR1 JOY4.3_VR2 LDO.1 LoRa.1 LoRa.2 LoRa.9 LoRa.16 R6.1 R8.1 R9.1 R10.1 R15.2 R16.2 R17.1 R18.1 R19.2 R20.1 R21.1 R22.2 R23.2 R24.1 RESET.2 SW_PWR.1 T1.3 T2.3 Vin_JST.2 | length 37.4
  Top Layer w0.254: C4.2 33.283,30.773 36.698,30.773 36.991,31.067 36.991,32.091 ADC1.3 37,33.681 37.5,34.181 v1(37.5,34.25) ; 42.95,70.9 42.95,73.3 43.25,73.6 45.25,73.6 ; ADC2.1 96.009,27.909 96.009,28.933 96.825,29.75 98,29.75 98.25,29.5 98.25,29.227 ; v1(96.5,25.75) 97,26.25 ADC2.3 97.009,27.909 97.009,28.933 97.302,29.227 98.25,29.227 ; C16.2 100.717,29.227 98.25,29.227
  Top Layer w0.5: C3.2 45.601,56.206 C1.2 50.042,56.523 50.305,56.26 ; C18.2 73.134,51.899 C17.2 LoRa.2@76.636,52.037 ; LoRa.2@76.636,52.102 LoRa.2
  other v1: 33.75,21.25 37.25,21.25 76.75,58.25 76.75,60.25
JOY1_SW: "ESP32 S3.4" JOY1.c | length 52.4
  Top Layer w0.254: v1(48.55,52.45) 50.305,52.45
  Bottom Layer w0.254: JOY1.c 12.75,36.75 15.25,34.25 29,34.25 47.2,52.45 v1(48.55,52.45)
JOY1_X: ADC1.5 C9.1 JOY1.2_VR1 | length 20.3
  Top Layer w0.254: JOY1.2_VR1 23.425,34 33.75,34 34.697,34.947 34.697,35.414 C9.1 ; C9.1@35.169,35.81 35.694,35.285 35.77,35.285 36,35.055 ADC1.5
JOY1_Y: ADC1.4 C7.1 JOY1.2_VR2 | length 17.4
  Top Layer w0.254: JOY1.2_VR2 37.611,39.314 37.611,35.81 36.5,34.7 ADC1.4
JOY2_SW: "ESP32 S3.5" JOY2.c | length 57
  Top Layer w0.254: v1(48.5,51.18) 50.305,51.18
  Bottom Layer w0.254: JOY2.c 12.75,12.197 13.372,12.819 13.669,12.819 21.25,20.4 21.25,25.5 46.93,51.18 v1(48.5,51.18)
JOY2_X: ADC1.7 C11.1 JOY2.2_VR1 | length 33.1
  Top Layer w0.254: JOY2.2_VR1 21,8.514 26.207,13.721 32.013,13.763 35.75,17.5 35.75,22.162 C11.1 ; ADC1.7 36.5,24.889 C11.1@37.451,23.938
JOY2_Y: ADC1.6 C10.1 JOY2.2_VR2 | length 14.9
  Top Layer w0.254: JOY2.2_VR2 35.118,19.443 C10.1 ; C10.1@35.118,23.938 36,24.82 ADC1.6
JOY3_SW: "ESP32 S3.39" JOY3.c | length 60.7
  Top Layer w0.254: 67.805,54.99 69.49,54.99 v1(69.5,55)
  Bottom Layer w0.254: v1(69.5,55) 71.25,56.75 117.739,56.75 121.25,53.239 JOY3.c
JOY3_X: ADC2.7 C15.1 JOY3.2_VR1 | length 33
  Top Layer w0.254: ADC2.7 97.5,35.146 96.494,36.152 96.494,43.494 104.229,51.229 108.538,51.229 111.844,54.536 112.786,54.536 JOY3.2_VR1
JOY3_Y: ADC2.6 C14.1 JOY3.2_VR2 | length 15.1
  Top Layer w0.254: ADC2.6 98,35.27 98.882,36.152 98.882,40.632 JOY3.2_VR2
JOY4_SW: "ESP32 S3.38" JOY4.c | length 79.3
  Top Layer w0.254: 67.805,53.72 67.82,53.735 v1(69.485,53.735)
  Bottom Layer w0.254: v1(69.485,53.735) 71.5,55.75 97.75,55.75 121.25,32.25 JOY4.c
JOY4_X: ADC2.5 C13.1 JOY4.2_VR1 | length 22.4
  Top Layer w0.254: ADC2.5 98,25.002 98.882,24.12 98.882,22.368 101.152,20.098 109.523,20.098 JOY4.2_VR1
JOY4_Y: ADC2.4 C12.1 JOY4.2_VR2 | length 17.3
  Top Layer w0.254: C12.1 102,18.421 102,15.075 JOY4.2_VR2 ; C12.1@96.425,24.072 97.5,25.146 ADC2.4
LED1: "ESP32 S3.11" D1.2 | length 27.5
  Top Layer w0.254: 50.305,43.56 50.365,43.5 61.681,43.5 62.181,43 v1(62.25,43) ; D1.2 60.55,29.1 62.5,31.05 62.5,35.5 v1(61.75,36.25)
  Bottom Layer w0.254: v1(61.75,36.25) 61.75,39 62.25,39.5 v1(62.25,43)
LED2: "ESP32 S3.10" D2.2 | length 29.3
  Top Layer w0.254: 50.305,44.83 51.67,44.83 52.163,44.337 62.663,44.337 v1(63.25,43.75) ; v1(63,36.25) 63,36.116 63.25,35.866 63.25,31.45 65.6,29.1 D2.2
  Bottom Layer w0.254: v1(63,36.25) 63,39 63.25,39.25 v1(63.25,43.75)
LED3: "ESP32 S3.9" D3.2 | length 35.9
  Top Layer w0.254: 50.305,46.1 51.65,46.1 52.466,45.284 63.466,45.284 v1(64.25,44.5) ; v1(64.25,36.25) 64.25,36.116 64,35.866 64,31.431 65.181,30.25 70.25,30.25 70.618,29.882 70.618,29.018 D3.2
  Bottom Layer w0.254: v1(64.25,36.25) v1(64.25,44.5)
LED4: "ESP32 S3.8" D4.2 | length 42.5
  Top Layer w0.254: 50.305,47.37 51.88,47.37 53.019,46.231 64.269,46.231 v1(65.25,45.25) ; v1(65.5,36.25) 64.75,35.5 64.75,31.5 65.25,31 74.75,31 75.6,30.15 D4.2
  Bottom Layer w0.254: v1(65.25,45.25) 65.25,39.5 65.5,39.25 v1(65.5,36.25)
NetADC1_1: ADC1.1 R4.1 | length 7.4
  Top Layer w0.254: ADC1.1 38,32.424 38.021,32.445 42.548,32.445 43.479,33.376 R4.1
NetADC1_2: ADC1.2 R5.1 | length 5.3
  Top Layer w0.254: ADC1.2 37.509,32.109 37.509,33.133 37.802,33.427 41.607,33.427 R5.1
NetADC2_2: ADC2.2 R13.1 | length 5.5
  Top Layer w0.254: R13.1 96.023,26.398 96.491,26.867 96.491,27.891 ADC2.2
NetC2_1: "ESP32 S3.3" C2.1 R1.2 RESET.1 | length 16.6
  Top Layer w0.254: RESET.1 39.25,53.65 42.851,50.049 C2.1 45.933,50.065 45.933,51.183 48.47,53.72 50.305,53.72
NetD1_1: D1.1 R16.1 | length 3
  Top Layer w0.254: D1.1 58.45,26.075 R16.1
NetD2_1: D2.1 R19.1 | length 3
  Top Layer w0.254: D2.1 63.5,26.025 R19.1
NetD3_1: D3.1 R22.1 | length 3
  Top Layer w0.254: D3.1 68.5,26.025 R22.1
NetD4_1: D4.1 R23.1 | length 3
  Top Layer w0.254: D4.1 73.5,26.025 R23.1
NetD_PWR_1: D_PWR.1 R15.1 | length 2
  Top Layer w0.5: R15.1 D_PWR.1
NetJOY1_d: JOY1.d R10.2 | length 5.6
  Top Layer w0.254: R10.2 6.726,45.199 8.25,43.675 JOY1.d
NetJOY2_d: JOY2.d R9.2 | length 5.5
  Top Layer w0.254: R9.2 6.876,13.949 8.25,12.575 JOY2.d
NetJOY3_d: JOY3.d R8.2 | length 5.9
  Top Layer w0.254: JOY3.d 125.75,47.5 127.449,45.801 R8.2
NetJOY4_d: JOY4.d R6.2 | length 5.8
  Top Layer w0.254: JOY4.d 125.75,16.325 127.274,14.801 R6.2
NetLDO_3: LDO.3 SW_PWR.2 | length 8.6
  Top Layer w0.5: LDO.3 85.205,61.705 SW_PWR.2
NetR17_2: R17.2 SW1.B' | length 4
  Top Layer w0.254: SW1.B' 45.742,14.5 46.941,15.699 R17.2
NetR18_2: R18.2 SW2.B' | length 4
  Top Layer w0.254: SW2.B' 58.9,14.5 60.099,15.699 R18.2
NetR20_2: R20.2 SW3.B' | length 4
  Top Layer w0.254: SW3.B' 72.349,14.5 73.599,15.75 R20.2
NetR21_2: R21.2 SW4.B' | length 3.7
  Top Layer w0.254: SW4.B' 85.65,14.5 86.849,15.699 R21.2
NetR24_2: R24.2 SW5.B' | length 3.7
  Top Layer w0.254: SW5.B' 98.65,14.5 99.849,15.699 R24.2
NetSW_PWR_3: SW_PWR.3 Vin_JST.1 | length 13.1
  Top Layer w0.5: SW_PWR.3 87.71,66.75 96.604,66.75 Vin_JST.1
SCL: "ESP32 S3.6" ADC1.10 ADC2.10 R2.1 R11.1 | length 100.3
  Top Layer w0.254: ADC1.10 38,27.425 38.021,27.403 42.548,27.403 43.428,26.524 R2.1 44.75,26.433 v1(44.75,24.75) ; 50.305,49.91 50.366,49.971 v1(51.548,49.971) ; v1(89,35.5) R11.1 90.43,33.551 91.36,32.621 95.979,32.621 96,32.599 ADC2.10
  Bottom Layer w0.254: v1(44.75,24.75) 44.75,25.306 44.75,26.487 44.75,31.358 51.548,38.156 v1(51.548,49.971) ; 44.845,26.487 53.358,35 66.723,35 71.973,40.25 84.25,40.25 v1(89,35.5)
SDA: "ESP32 S3.7" ADC1.9 ADC2.9 R3.1 R12.1 | length 104.6
  Top Layer w0.254: ADC1.9 37.509,27.891 37.509,26.867 37.902,26.473 R3.1 41.5,26.314 v1(41.5,24.75) ; v1(48.75,48.75) 50.195,48.75 50.305,48.64 ; v1(92.25,35.5) R12.1 92.374,33.427 96.198,33.427 96.491,33.133 96.491,32.109 ADC2.9
  Bottom Layer w0.254: v1(48.75,48.75) 48.75,36 41.5,28.75 v1(41.5,24.75) 42.25,24 45.5,24 46.5,25 46.5,27.25 53.75,34.5 66.865,34.5 72.115,39.75 83.75,39.75 89,34.5 91,34.5 91.905,35.405 92.155,35.405 v1(92.25,35.5)
SPI2_DI00: "ESP32 S3.22" LoRa.5 | length 22.7
  Top Layer w0.254: 60.96,38.5 61,38.54 v1(61,40.25) ; v1(74.5,46) 76.535,46 LoRa.5
  Bottom Layer w0.254: v1(61,40.25) 61,43.909 63.612,46.52 73.845,46.52 73.881,46.485 74.366,46 v1(74.5,46)
SPI2_MISO: "ESP32 S3.21" LoRa.13 | length 44.9
  Top Layer w0.254: 59.69,38.5 59.75,38.56 v1(59.75,40.25) ; LoRa.13 94.954,48.296 v1(95,48.25)
  Bottom Layer w0.254: v1(59.75,40.25) 59.75,43.334 63.39,46.974 75.087,46.974 76.363,48.25 v1(95,48.25)
SPI2_MOSI: "ESP32 S3.19" LoRa.14 | length 47.2
  Top Layer w0.254: 57.15,38.5 57.25,38.6 v1(57.25,40.25) ; LoRa.14 v1(94.954,50.296) v1@95,50.25
  Bottom Layer w0.254: v1(57.25,40.25) 57.25,41.534 63.144,47.428 74.899,47.428 77.767,50.296 v1(94.954,50.296)
SPI2_RST: "ESP32 S3.18" LoRa.4 | length 26.4
  Top Layer w0.254: 55.88,38.5 56,38.62 v1(56,40.25) ; v1(74.5,48.25) 76.785,48.25 LoRa.4
  Bottom Layer w0.254: v1(56,40.25) 56,41 63,48 74.116,48 74.366,48.25 v1(74.5,48.25)
SPI2_SCK: "ESP32 S3.20" LoRa.12 | length 46
  Top Layer w0.254: 58.42,38.5 58.5,38.42 v1(58.5,36.75) ; LoRa.12 94.954,46.296 v1(95,46.25)
  Bottom Layer w0.254: v1(58.5,36.75) 59.75,35.5 66.581,35.5 77.331,46.25 v1(95,46.25)
SPI2_SS: "ESP32 S3.17" LoRa.15 | length 49.9
  Top Layer w0.254: v1(54.605,40.276) 54.605,38.505 54.61,38.5 ; LoRa.15 v1(94.954,52.296) v1@95,52.25
  Bottom Layer w0.254: v1(54.605,40.276) 62.829,48.5 73.75,48.5 77.546,52.296 v1(94.954,52.296)
SW1: "ESP32 S3.28" SW1.B | length 40.7
  Top Layer w0.254: 67.805,41.02 67.862,40.963 68.787,40.963 69.028,40.722 69.028,34.028 v1(69,34)
  Bottom Layer w0.254: SW1.B 45.342,20.75 57.5,20.75 69,32.25 v1(69,34)
SW2: "ESP32 S3.29" SW2.B | length 30
  Top Layer w0.254: 67.805,42.29 67.882,42.213 68.787,42.213 69.75,41.25 v1(69.75,35)
  Bottom Layer w0.254: SW2.B 69.75,32 v1(69.75,35)
SW3: "ESP32 S3.30" SW3.B | length 26.3
  Top Layer w0.254: 67.805,43.56 67.902,43.463 68.787,43.463 70.5,41.75 v1(70.5,36)
  Bottom Layer w0.254: SW3.B 70.452,19.202 70.452,35.952 v1(70.5,36)
SW4: "ESP32 S3.31" SW4.B | length 32.9
  Top Layer w0.254: 67.805,44.83 67.922,44.713 68.787,44.713 71.25,42.25 v1(71.25,37)
  Bottom Layer w0.254: v1(71.25,37) 71.25,32 83.502,19.748 83.502,19.248 SW4.B
SW5: "ESP32 S3.32" SW5.B | length 46.5
  Top Layer w0.254: 67.805,46.1 68.9,46.1 72,43 v1(72,38)
  Bottom Layer w0.254: v1(72,38) 72,32.25 83.5,20.75 95,20.75 SW5.B
T_SW1: "ESP32 S3.33" T1.2 | length 37.3
  Top Layer w0.254: 67.805,47.37 69.13,47.37 72.889,43.611 v1(72.889,38.755)
  Bottom Layer w0.254: T1.2 54,27.5 60.5,34 67.007,34 71.763,38.755 v1(72.889,38.755)
T_SW2: "ESP32 S3.34" T2.2 | length 30.5
  Top Layer w0.254: 67.805,48.64 69.36,48.64 74.021,43.979 74.021,38.771 v1(74,38.75)
  Bottom Layer w0.254: v1(74,38.75) 74,31.25 78,27.25 T2.2
pads on no net: "ESP32 S3.12" "ESP32 S3.15" "ESP32 S3.16" "ESP32 S3.23" "ESP32 S3.24" "ESP32 S3.25" "ESP32 S3.26" "ESP32 S3.27" "ESP32 S3.35" "ESP32 S3.36" "ESP32 S3.37" "ESP32 S3.41_1" "ESP32 S3.41_2" "ESP32 S3.41_3" "ESP32 S3.41_4" "ESP32 S3.41_5" "ESP32 S3.41_6" "ESP32 S3.41_7" "ESP32 S3.41_8" "ESP32 S3.41_9" "ESP32 S3.41_10" "ESP32 S3.41_11" "ESP32 S3.41_12" "ESP32 S3.41_13" "ESP32 S3.41_14" "ESP32 S3.41_15" "ESP32 S3.41_16" "ESP32 S3.41_17" "ESP32 S3.41_18" "ESP32 S3.41_19" "ESP32 S3.41_20" "ESP32 S3.41_21" "USB micro B.1" "USB micro B.4" JOY1.1 JOY1.2 JOY1.3 JOY1.4 JOY1.a JOY2.1 JOY2.2 JOY2.3 JOY2.4 JOY2.a JOY3.1 JOY3.2 JOY3.3 JOY3.4 JOY3.a JOY4.1 JOY4.2 JOY4.3 JOY4.4 JOY4.a LoRa.6 LoRa.7 LoRa.8 LoRa.10 LoRa.11 RESET.3 RESET.4 SW1.A' SW2.A' SW3.A' SW4.A' SW5.A'

## Polygon pours and split planes (outlines as drawn)
GND on Top Layer "NONET_L-01_P-001" (solid, pour order 3): 1,1 1,74 134,74 134,1
GND on Bottom Layer "NONET_L-01_P-001" (solid, pour order 4): 1,1 1,74 134,74 134,1

## Silkscreen, mask and mechanical layers (free items; w line width, h text height)
Top Overlay:
  text "D1" at 58.504,30.504 h1.52
  text "D3" at 68.504,30.504 h1.52
Mechanical 1:
  the board outline again, w0.254

## Text inside footprints (layer, text, board x,y; h text height)
"USB micro B": Mechanical 1 "PCB EDGE" at 51.45,75.15 h0.3 r180